# Allegro board ex_rlc.brd
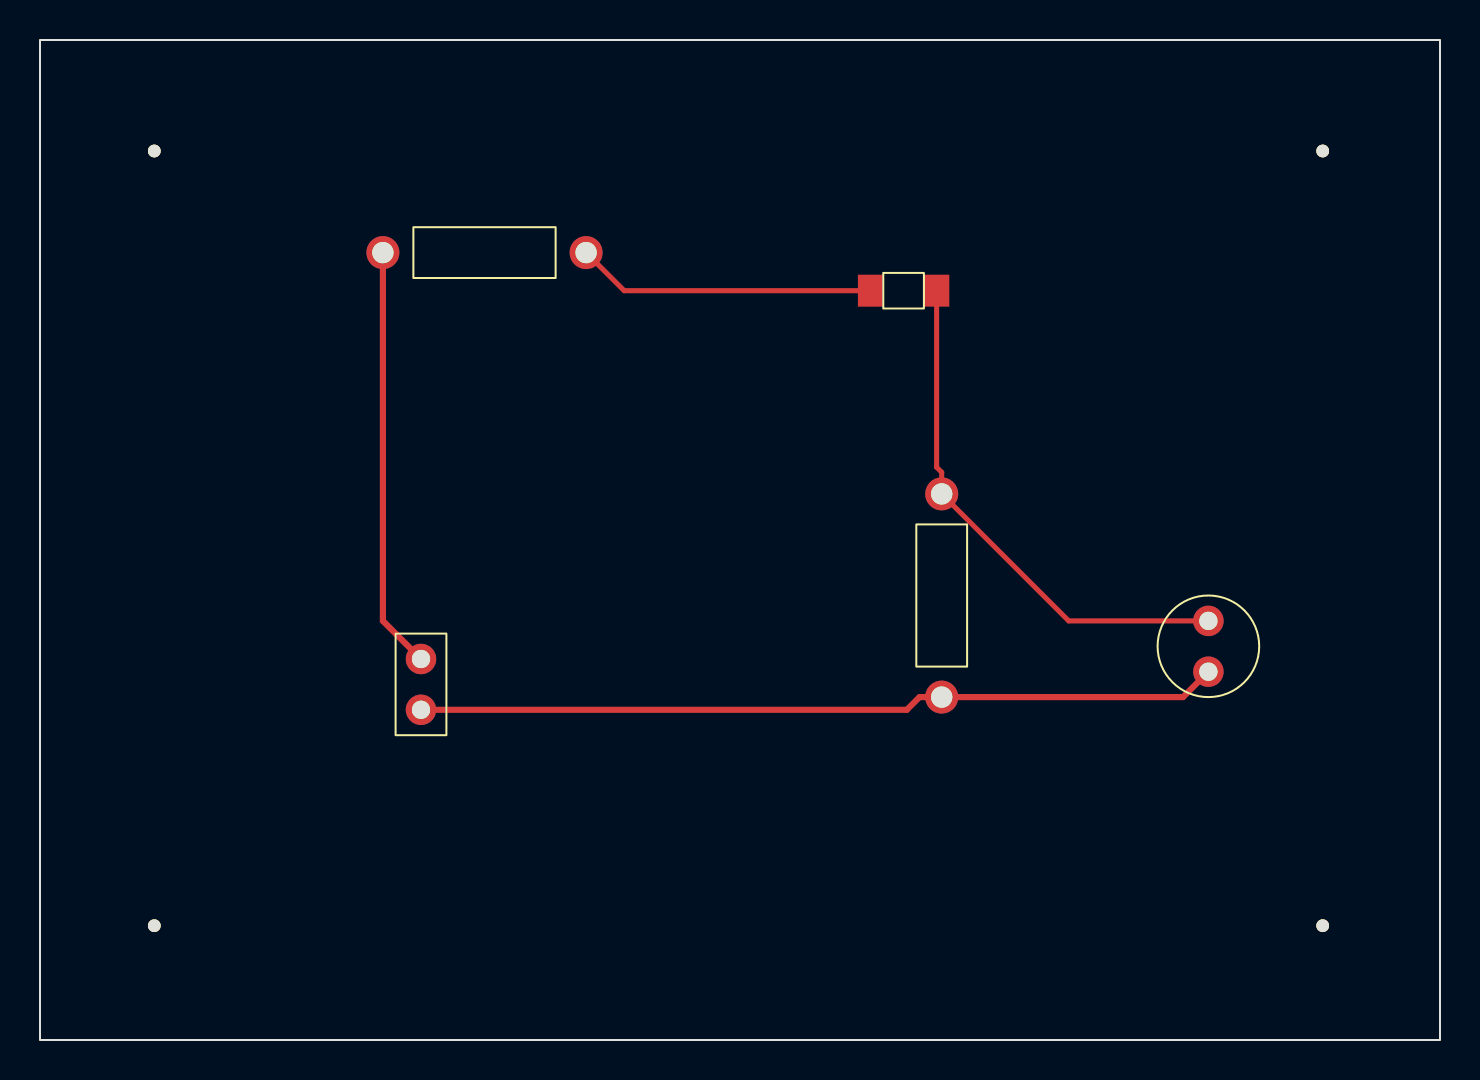
[diagram p0: board, top side]
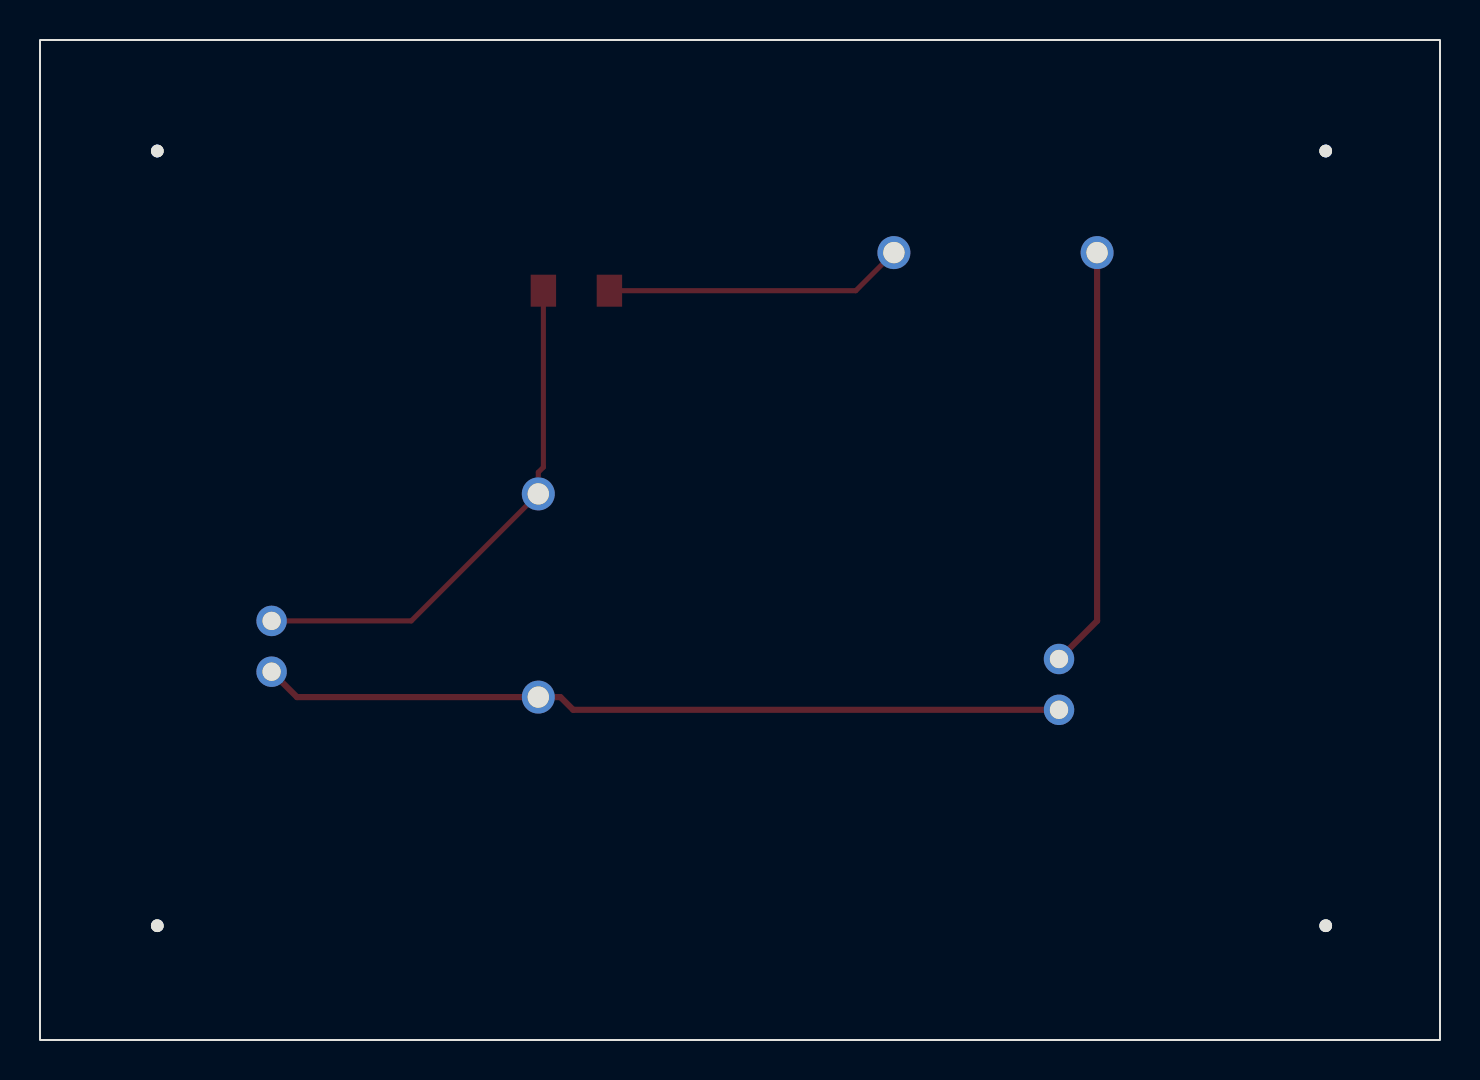
[diagram p1: board, bottom side, seen from below]

Outline 70 x 50 mm; copper layers: TOP, BOTTOM. Coordinates in mm from the lower left corner of the outline.
Outline path: rectangle 0,0 70,50

## Design rules (mm)
constraint set DEFAULT: min track width 0.254
net group POWERRULE: nets GND VCC

## Placement (name value [footprint] x y rotation side)
C1  1u  [CAP196]  58.42 18.41 0 top
J1  CON2  [JUMPER2]  19.05 19.05 270 top
L1  100n  [SMDRES]  43.18 37.46 0 top
NOREF  -  [unnamed]  5.71 5.71 0 top
NOREF#2  -  [unnamed]  64.14 44.45 0 top
NOREF#3  -  [unnamed]  64.14 5.71 0 top
NOREF#4  -  [unnamed]  5.71 44.45 0 top
R1  330  [RES400]  17.14 39.37 270 top
R2  330  [RES400]  45.09 17.14 0 top

## Library data of the parts
C1 = CAP NP: Tolerance: ***; User Part Number: ***
J1 = CON2: User Part Number: ***
L1 = INDUCTOR: Tolerance: ***; User Part Number: ***
R1 R2 = R: Tolerance: ***; User Part Number: ***

## Footprints (pads in the part's own frame, mm; a bottom-side part is the same pattern mirrored in y, then rotated)
CAP196
  round 1.524 hole 0.914: 1(0,0) 2(0,2.54)
JUMPER2
  round 1.524 hole 0.914: 1(0,0) 2(2.54,0)
RES400
  round 1.651 hole 1.067: 1(0,0) 2(0,10.16)
SMDRES
  rect 1.27x1.6 smd: 1(-1.651,0) 2(1.651,0)
unnamed
  round 0.635 hole 3.175 unplated: (0,0)

## Nets
GND: C1.1 J1.2 R2.1
VCC: J1.1 R1.1
KKK: L1.1 R1.2
N00096: C1.2 L1.2 R2.2

## Routing (per net, layer and track width the routed paths; a pad name or vN(x,y) marks a point on that pad's centre or on a via; arc(x,y) is an arc through that point)
GND: length 40.2
  TOP w0.308: J1.2 43.34,16.51 43.98,17.14 R2.1 57.15,17.14 C1.1
VCC: length 21.1
  TOP w0.308: J1.1 17.14,20.96 R1.1
KKK: length 15
  TOP w0.254: L1.1 29.21,37.46 R1.2
N00096: length 26.2
  TOP w0.254: L1.2 44.83,28.64 45.09,28.39 R2.2 51.44,20.96 C1.2

## Text on the board
TOLERANCE_TOP: FIGURE | FINISHED_SIZE | 0.914 | 1.067 | 3.175 | DRILL CHART: TOP to BOTTOM | ALL UNITS ARE IN MILLIMETERS | PLATED | NON-PLATED | QTY | 4
